# Altium PCB PCB.PcbDoc (part 1 of 2)
Units mm, origin at the board's own origin, x right, y up, seen from the top; angles counter-clockwise.
Board outline 100.5 x 40.52 mm, 2 copper layers (Top Layer, Bottom Layer); 44 components, 39 nets, 211 pads, 76 vias.
Unrouted connection lines stored in the file: 2.
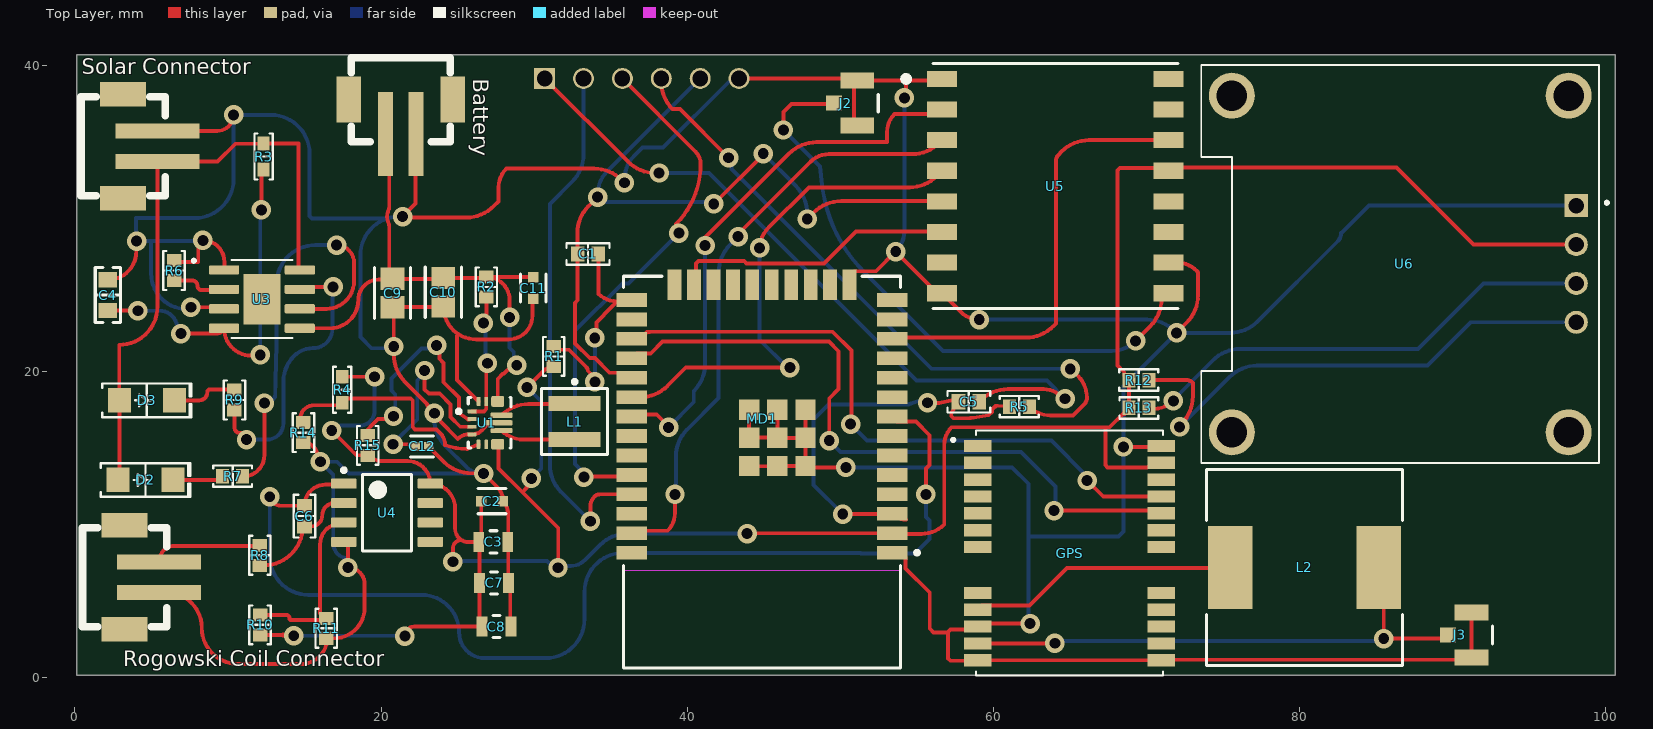
[diagram p0: Top Layer view]
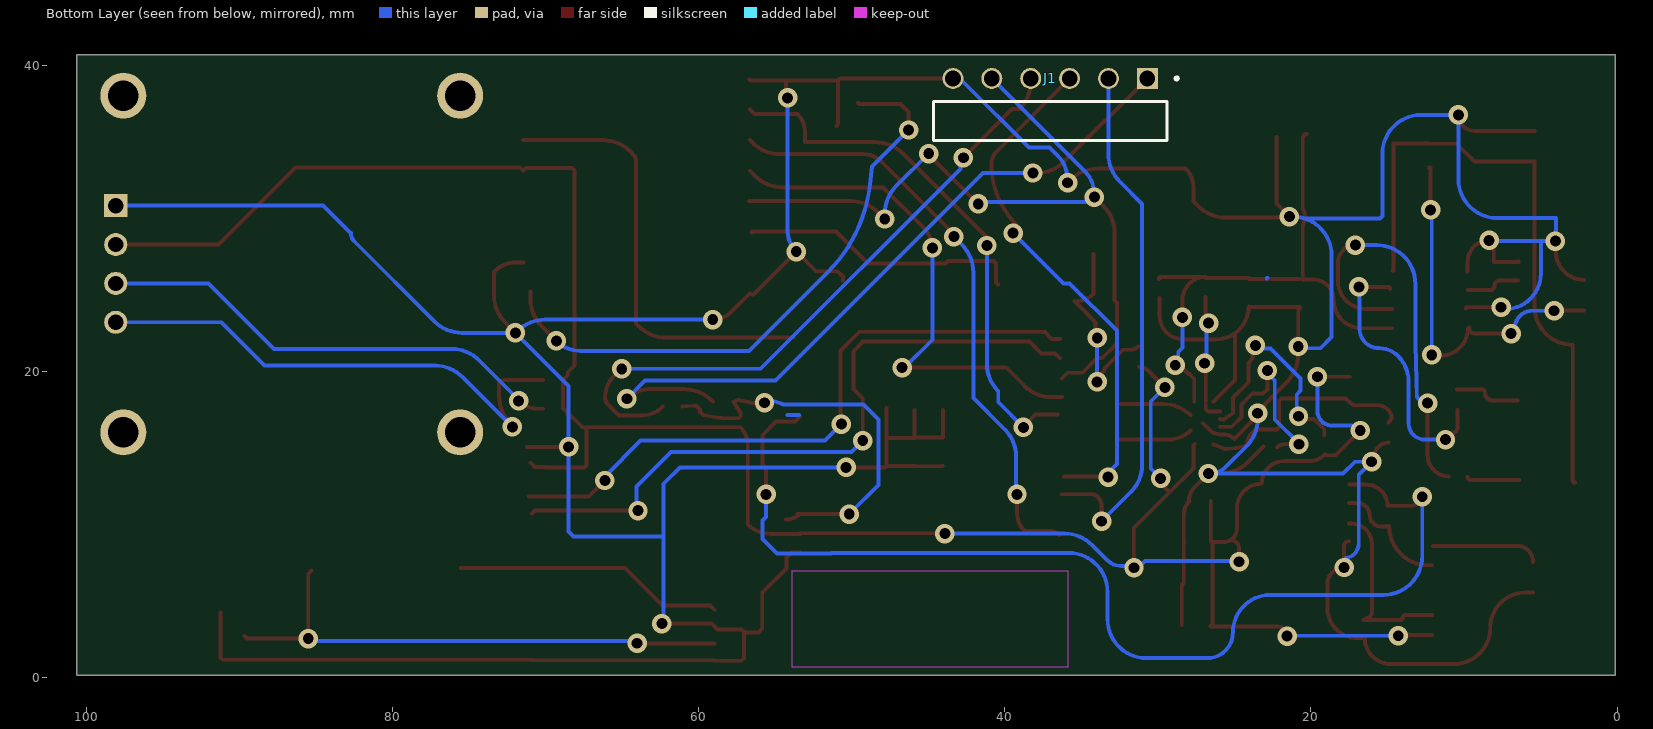
[diagram p1: Bottom Layer view, seen from below]
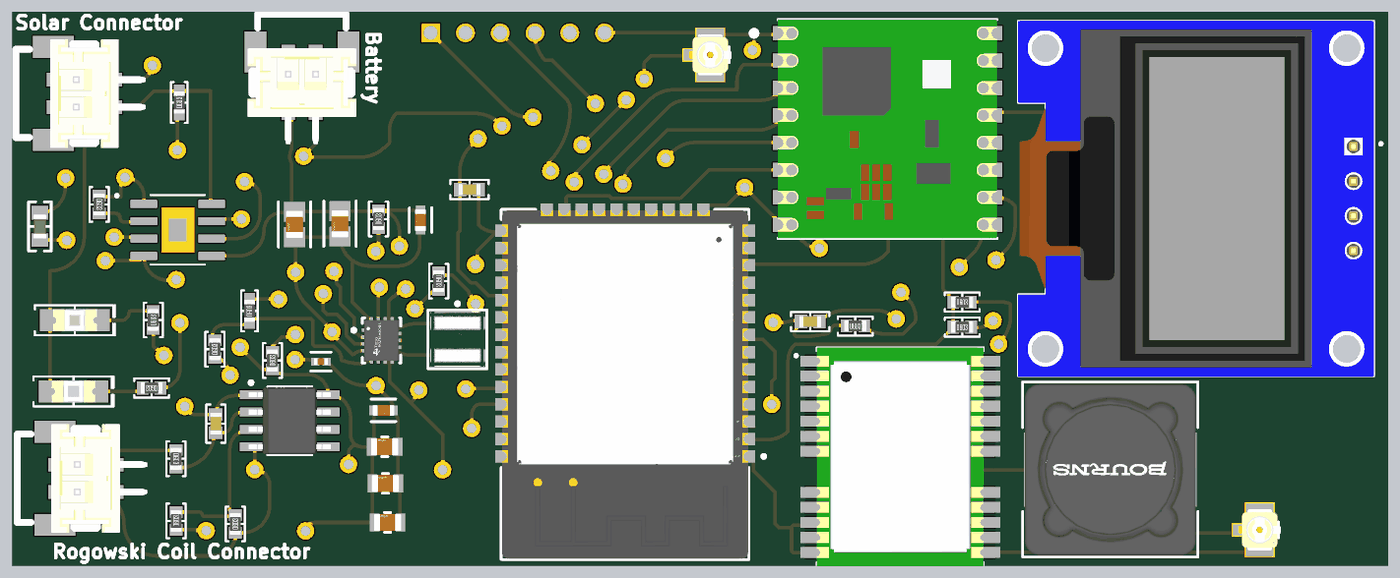
[diagram p2: 3D render of the assembled board from above, using the file's embedded part models]

## Layer stack, top to bottom
Top Solder: solder mask 0.0102, Solder Resist, Dk 3.5
Top Layer: signal copper 0.0356
Dielectric 1: dielectric 0.32, FR-4, Dk 4.8
Bottom Layer: signal copper 0.0356
Bottom Solder: solder mask 0.0102, Solder Resist, Dk 3.5

## Board outline
0.127,0.159 0.127,40.681 100.626,40.681 100.626,0.159

## Design rules (kind name [scope] priority, off if disabled: settings)
Clearance [All] p1: gap=0.254 ignorepadtopadclearanceinfootprint=FALSE
PolygonConnect [All] p1: connectstyle=Relief reliefconductorwidth=0.254 reliefentries=4 polygonreliefangle="90 Angle" airgapwidth=0.254
RoutingVias [All] p1: holewidth=0.711 width=1.27 viastyle="Through Hole" minholewidth=0.711 minwidth=1.27 maxholewidth=0.711 maxwidth=1.27
SolderMaskExpansion [All] p1: expansion=0.102 istentingtop=FALSE
SupplyNets "Schematic Supply Nets_2" [InNet('+5')] p1: voltage=0.000
SupplyNets "Schematic Supply Nets_1" [InNet('PG')] p2: voltage=0.000
SupplyNets "Schematic Supply Nets" [InNet('GND')] p3: voltage=0.000
Width [All] p1: maxlimit=0.254 minlimit=0.254 preferedwidth=0.254
30 further rules are at their usual default settings.

## Components (designator, comment, footprint, x,y, rotation, side; value= is the part's Value field where it differs from the comment)
Battery "B2B-PH-SM4-TB(LF)(SN)" B2B-PH-SM4-TB(LF)(SN)#1 21.286,35.502 r0 top (schematic designator "Batery Connector")
C1 "0.1µF" "CAP 0603_1608" 33.521,27.672 r0 top
C2 "TMK107BBJ106MA-T" FP-0603-L_1_6_0_2-W_0_8_0-MFG 27.246,11.525 r0 top
C3 "GRM21BC81C226ME44L" FP-GRM21B-0_2-e0_2_0_7-MFG 27.335,8.864 r180 top
C4 "10 µF" "MURATA GRM188 0603_1608" 2.154,24.982 r270 top
C5 "0.1µF" "CAP 0603_1608" 58.403,18.017 r180 top
C6 "1 µF" "CAP 0603_1608" 14.998,10.552 r90 top
C7 "GRM21BC81C226ME44L" FP-GRM21B-0_2-e0_2_0_7-MFG 27.383,6.184 r180 top
C8 "GRM21BC81C226ME44L" FP-GRM21B-0_2-e0_2_0_7-MFG 27.541,3.328 r180 top
C9 "GRM21BC71E106ME11L" FP-GRM21B-0_2-e0_2_0_7-IPC_A 20.749,25.122 r270 top
C10 "GRM21BC71E106ME11L" FP-GRM21B-0_2-e0_2_0_7-IPC_A 24.068,25.176 r270 top
C11 "TMK107BBJ106MA-T" FP-0603-L_1_6_0_2-W_0_8_0-MFG 29.948,25.446 r270 top
C12 "TMK105B7104MV-FR" FP-0402-L_1_0_0_05-W_0_5-IPC_B 22.677,15.097 r0 top
D2 "Green" "LED 1206_3216 GREEN" 4.609,12.91 r0 top
D3 "Red" "LED 1206_3216 RED" 4.701,18.112 r0 top
GPS "NEO-6M-GPS" XCVR_NEO-6M-GPS 64.98,8.13 r0 top
J1 "FTDI Connector" SAMTEC_MTSW-106-09-G-S-375-RA 37.04,36.35 r180 bottom
J2 "U.FL-R-SMT-1(10)" FP-U_FL-R-SMT-1_10-MFG 51.11,37.529 r90 top
J3 "U.FL-R-SMT-1(10)" FP-U_FL-R-SMT-1_10-MFG 91.236,2.784 r90 top
L1 "XFL4020-152MEC" FP-XFL4020-MFG 32.646,16.725 r270 top
L2 "SRR1260-270M" FP-SRR1260-MFG 80.326,7.194 r180 top value=27uH
MD1 "ESP32-WROOM-32" FP-ESP32-WROOM-32-MFG 44.892,13.419 r180 top
R1 "10 kOhms" "RES 0603_1608" 31.276,20.981 r270 top
R2 "10 kOhms" "RES 0603_1608" 26.882,25.521 r90 top
R3 "=Value" "YAGEO RES 0603_1608" 12.328,34.04 r90 top
R4 "470 kOhms" "YAGEO RES 0603_1608" 17.458,18.802 r90 top
R5 "10 kOhms" "RES 0603_1608" 61.699,17.698 r0 top
R6 "3.32 kOhms" "RES 0603_1608" 6.479,26.591 r270 top
R7 "1 kOhms" "RES 0603_1608" 10.307,13.156 r180 top
R8 "100 kOhms" "RES 0603_1608" 12.085,7.984 r270 top
R9 "1 kOhms" "RES 0603_1608" 10.424,18.134 r90 top
R10 "10 kOhms" "RES 0603_1608" 12.098,3.441 r90 top
R11 "10 kOhms" "RES 0603_1608" 16.421,3.217 r90 top
R12 "4.7 kOhms" "RES 0603_1608" 69.506,19.437 r0 top
R13 "4.7 kOhms" "RES 0603_1608" 69.511,17.614 r0 top
R14 "150 kOhms" "RES 0603_1608" 14.929,15.999 r90 top
R15 "100 kOhms" "RES 0603_1608" 19.13,15.17 r90 top
"Rogowski Coil Connector" "B2B-PH-SM4-TB(LF)(SN)" B2B-PH-SM4-TB(LF)(SN)#2 5.492,6.553 r270 top
"Solar Connector" "B2B-PH-SM4-TB(LF)(SN)" B2B-PH-SM4-TB(LF)(SN)#3 5.394,34.708 r90 top
U1 "TPS630702RNMR" FP-RNM0015A-MFG 27.098,16.637 r0 top
U3 "TP4056" SOP127P600X175-9N 12.218,24.725 r0 top
U4 "TLV2372IDR" D0008A_M 20.395,10.766 r0 top
U5 "RFM95W-868S2" XCVR_RFM95W-868S2 64.054,32.108 r0 top
U6 "DM-OLED096-636" MODULE_DM-OLED096-636 86.585,27.018 r270 top

## Footprints (in the part's own frame and the unit in brackets; to place one, negate y for a bottom-side part, rotate by r counter-clockwise, add the part's x,y. Pads: shape width x height; smd on the part's side, far side on the other; paste and mask are expansions set on the pad)
B2B-PH-SM4-TB(LF)(SN)#1 [mm]
  rect 1x5.5 smd: 1(-1,0) 2(1,0)
  rect 1.6x3 smd: 3(3.4,2.25) 4(-3.4,2.25)
  silkscreen extent -3.23,-0.5 3.23,5, body extent -3.98,-4.5 3.98,2.5, height 6.75
B2B-PH-SM4-TB(LF)(SN)#2 [mm]
  rect 1x5.5 smd: 1(-1,0) 2(1,0)
  rect 1.6x3 smd: 3(3.4,-2.25) 4(-3.4,-2.25)
  silkscreen extent -3.23,-5 3.23,0.5, body extent -3.98,-2.5 3.98,4.5, height 6.75
B2B-PH-SM4-TB(LF)(SN)#3 [mm]
  rect 1x5.5 smd: 2(1,0) ""(-1,0)
  rect 1.6x3 smd: 3(3.4,2.25) 4(-3.4,2.25)
  silkscreen extent -3.23,-0.5 3.23,5, body extent -3.98,-4.5 3.98,2.5, height 6.75
"CAP 0603_1608" [mm] "Chip Capacitor, 2-Leads, Body 1.60x0.80mm, IPC Medium Density"
  rect 0.9x1 smd: 1(-0.675,0) 2(0.675,0)
  silkscreen extent -1.4,-0.7 1.4,0.7, body extent -0.8,-0.41 0.8,0.41, height 0.82
D0008A_M [mm] "SOIC, 8-Leads, Body 5x4mm, Pitch 1.27mm, IPC Low Density"
  rrect15% 1.65x0.65 smd: 1(-2.825,1.905) 2(-2.825,0.635) 3(-2.825,-0.635) 4(-2.825,-1.905) 5(2.825,-1.905) 6(2.825,-0.635) 7(2.825,0.635) 8(2.825,1.905)
  silkscreen extent -2.95,-2.5 1.6,2.9, body extent -3,-2.45 3,2.45, height 1.63
FP-0402-L_1_0_0_05-W_0_5-IPC_B [mm]
  rect 0.615x0.572 smd paste+0 mask+0: 1(-0.429,0) 2(0.429,0)
  silkscreen extent -0.74,-0.69 0.74,0.69, body extent -0.89,-0.44 0.89,0.44, height 0.25
FP-0603-L_1_6_0_2-W_0_8_0-MFG [mm]
  rect 0.7x0.7 smd paste+0 mask+0: 1(-0.7,0) 2(0.7,0)
  silkscreen extent -0.9,-0.82 0.9,0.82, body extent -1.15,-0.6 1.15,0.6, height 0.25
FP-ESP32-WROOM-32-MFG [mm]
  rect 2x0.9 smd paste+0 mask+0: 1(-8.5,5.26) 2(-8.5,3.99) 3(-8.5,2.72) 4(-8.5,1.45) 5(-8.5,0.18) 6(-8.5,-1.09) 7(-8.5,-2.36) 8(-8.5,-3.63) 9(-8.5,-4.9) 10(-8.5,-6.17) 11(-8.5,-7.44) 12(-8.5,-8.71) 13(-8.5,-9.98) 14(-8.5,-11.25) 25(8.5,-11.25) 26(8.5,-9.98) 27(8.5,-8.71) 28(8.5,-7.44) 29(8.5,-6.17) 30(8.5,-4.9) 31(8.5,-3.63) 32(8.5,-2.36) 33(8.5,-1.09) 34(8.5,0.18) 35(8.5,1.45) 36(8.5,2.72) 37(8.5,3.99) 38(8.5,5.26)
  rect 0.9x2 smd paste+0 mask+0: 15(-5.715,-12.25) 16(-4.445,-12.25) 17(-3.175,-12.25) 18(-1.905,-12.25) 19(-0.635,-12.25) 20(0.635,-12.25) 21(1.905,-12.25) 22(3.175,-12.25) 23(4.445,-12.25) 24(5.715,-12.25)
  rect 1.33x1.33 smd paste+0 mask+0: 39(-2.835,-0.405) 39(-2.835,-4.075) 39(-2.835,-2.24) 39(-1,-0.405) 39(-1,-2.24) 39(-1,-4.075) 39(0.835,-0.405) 39(0.835,-2.24) 39(0.835,-4.075)
  Keep-Out Layer region: -9,6.45 9,6.45 9,12.75 -9,12.75
  Keep-Out Layer region: -9,6.45 9,6.45 9,12.75 -9,12.75
  silkscreen extent -10.25,-12.8 9.05,12.8, body extent -9.6,-13.35 9.6,12.9, height 0.25
FP-GRM21B-0_2-e0_2_0_7-IPC_A [mm]
  rect 1.455x1.556 smd paste+0 mask+0: 1(-0.926,0) 2(0.926,0)
  silkscreen extent -1.65,-1.18 1.65,1.18, body extent -2.15,-1.28 2.15,1.28, height 0.25
FP-GRM21B-0_2-e0_2_0_7-MFG [mm]
  rect 0.7x1.3 smd paste+0 mask+0: 1(-0.95,0) 2(0.95,0)
  silkscreen extent -0.23,-0.72 0.23,0.72, body extent -1.4,-0.82 1.4,0.82, height 0.25
FP-RNM0015A-MFG [mm]
  rrect40% 0.6x0.25 smd paste+0 mask-1000: 1(-1.15,0.75) 2(-1.15,0.25) 3(-1.15,-0.25) 4(-1.15,-0.75)
  rrect40% 0.25x0.6 smd paste+0 mask-1000: 5(-0.725,-1.4) 6(-0.225,-1.4) 14(-0.225,1.4) 15(-0.725,1.4)
  rrect29% 0.85x0.7 smd paste-1000 mask-1000: 7-8(0.525,-1.4) 12-13(0.525,1.4)
  rrect57% 1.45x0.35 smd paste-1000 mask-1000: 9(0.775,-0.5) 11(0.775,0.5)
  rrect57% 1.8x0.35 smd paste-1000 mask-1000: 10(0.6,0)
  silkscreen extent -2.15,-1.65 1.4,1.65, body extent -1.55,-1.85 1.6,1.85, height 0.25
FP-SRR1260-MFG [mm]
  rect 2.9x5.4 smd paste+0 mask+0: 1(-4.85,0) 2(4.85,0)
  silkscreen extent -6.4,-6.4 6.4,6.4, body extent -6.5,-6.5 6.5,6.5, height 0.25
FP-U_FL-R-SMT-1_10-MFG [mm]
  rect 1x1.05 smd paste-1000 mask+0: 1(0,1.525)
  rect 1.05x2.2 smd paste-1000 mask+0: 2(-1.475,0) 3(1.475,0)
  silkscreen extent -0.58,-1.38 0.58,-1.38, body extent -2.1,-1.48 2.1,2.15, height 0.25
FP-XFL4020-MFG [mm]
  rect 0.98x3.4 smd paste+0 mask+0: 1(-1.185,0) 2(1.185,0)
  silkscreen extent -2.72,-2.15 2.15,2.15, body extent -2.25,-2.25 2.25,2.25, height 0.25
"LED 1206_3216 GREEN" [mm] "Chip Diode, 2-Leads, Body 3.13x1.55mm, IPC Medium Density"
  rect 1.5x1.6 smd: 1(-1.8,0) 2(1.8,0)
  silkscreen extent -2.92,-1.1 2.92,1.1, body extent -1.6,-0.8 1.6,0.8, height 0.9
"LED 1206_3216 RED" [mm] "Chip Diode, 2-Leads, Body 3.13x1.55mm, IPC Medium Density"
  rect 1.5x1.6 smd: 1(-1.8,0) 2(1.8,0)
  silkscreen extent -2.92,-1.1 2.92,1.1, body extent -1.6,-0.8 1.6,0.8, height 0.9
MODULE_DM-OLED096-636 [mm]
  rect 1.508x1.508 / inner round 1.508 / far side rect 1.508x1.508 hole 1: 1(-3.81,11.5)
  round 1.508 hole 1: 2(-1.27,11.5) 3(1.27,11.5) 4(3.81,11.5)
  round 3 hole 2: S1(-11,11) S2(11,11) S3(11,-11) S4(-11,-11)
  silkscreen extent -13,-13 13,13.6, body extent -13,-13 13,13, height 5.66
"MURATA GRM188 0603_1608" [mm] "Chip Capacitor, 2-Leads, Body 1.60x0.80mm"
  rect 1x1.2 smd: 1(-1,0) 2(1,0)
  silkscreen extent -1.8,-0.83 1.8,0.83, body extent -0.9,-0.5 0.9,0.5, height 1
"RES 0603_1608" [mm] "Chip Resistor, 2-Leads, Body 1.60x0.80mm, IPC Medium Density"
  rect 0.85x0.95 smd: 1(-0.65,0) 2(0.65,0)
  silkscreen extent -1.27,-0.7 1.27,0.7, body extent -0.8,-0.4 0.8,0.4, height 0.45
SAMTEC_MTSW-106-09-G-S-375-RA [mm]
  rect 1.37x1.37 / inner round 1.37 / far side rect 1.37x1.37 hole 1.02: 01(6.35,2.79)
  round 1.37 hole 1.02: 02(3.81,2.79) 03(1.27,2.79) 04(-1.27,2.79) 05(-3.81,2.79) 06(-6.35,2.79)
  silkscreen extent -7.62,-1.27 8.37,2.89
SOP127P600X175-9N [mm]
  rrect25% 1.97x0.6 smd: 1(-2.475,1.905) 2(-2.475,0.635) 3(-2.475,-0.635) 4(-2.475,-1.905) 5(2.475,-1.905) 6(2.475,-0.635) 7(2.475,0.635) 8(2.475,1.905)
  rect 2.413x3.302 smd paste-3: 9(0,0)
  silkscreen extent -4.54,-2.55 2,2.6, body extent -3,-2.45 3,2.45
XCVR_NEO-6M-GPS [mm]
  rect 1.8x0.8 smd paste-2: 1(-6,7) 2(-6,5.9) 3(-6,4.8) 4(-6,3.7) 5(-6,2.6) 6(-6,1.5) 7(-6,0.4) 8(-6,-2.6) 9(-6,-3.7) 10(-6,-4.8) 11(-6,-5.9) 12(-6,-7) 13(6,-7) 14(6,-5.9) 15(6,-4.8) 16(6,-3.7) 17(6,-2.6) 18(6,0.4) 19(6,1.5) 20(6,2.6) 21(6,3.7) 22(6,4.8) 23(6,5.9) 24(6,7)
  silkscreen extent -7.7,-8 6.1,8, body extent -6.1,-8 6.1,8, height 2.6
XCVR_RFM95W-868S2 [mm]
  rect 1.95x1.05 smd: 1(-7.4,7) 2(-7.4,5) 3(-7.4,3) 4(-7.4,1) 5(-7.4,-1) 6(-7.4,-3) 7(-7.4,-5) 8(-7.4,-7) 9(7.4,-7) 10(7.4,-5) 11(7.4,-3) 12(7.4,-1) 13(7.4,1) 14(7.4,3) 15(7.4,5) 16(7.4,7)
  silkscreen extent -10.04,-8 8,8, body extent -8,-8 8,8, height 1.8
"YAGEO RES 0603_1608" [mm] "Chip Resistor, 2-Leads, Body 1.60x0.80mm"
  rect 0.9x0.8 smd: 1(-0.85,0) 2(0.85,0)
  silkscreen extent -1.5,-0.6 1.5,0.6, body extent -0.8,-0.4 0.8,0.4, height 0.45

## Part data
Battery "Rogowski Coil Connector" "Solar Connector": "Connector Header Surface Mount 2 position 0.079 (2.00mm)", Package="NON STANDARD-2 JST", Check_prices=https://www.snapeda.com/parts/B2B-PH-SM4-TB(LF)(SN)/JST+Sales+America+Inc./view-part/?ref=eda, MF="JST Sales", MP=B2B-PH-SM4-TB(LF)(SN), SnapEDA_Link=https://www.snapeda.com/parts/B2B-PH-SM4-TB(LF)(SN)/JST+Sales+America+Inc./view-part/?ref=snap
C1 C5: library part 06033C104K4T4A, "CAP CER 0.1UF 25V X7R 0603", Device Package="0603 (1608 Metric)", manufacturer="AVX Corporation", Operating Temperature="-55°C ~ 125°C", Ratings=AEC-Q200, Supplier Part Number 1=478-10673-1-ND, Temperature Coefficient=X7R, Tolerance=±10%, Voltage - Rated=25V, Applications=Automotive, Capacitance=0.1µF, componentlink1description=Datasheet, componentlink1url=http://datasheets.avx.com/AutoMLCC.pdf, componentlink2description="DigiKey Link", componentlink2url=http://digikey.com/product-detail/en/avx-corporation/06033C104K4T4A/478-10673-1-ND/7536544, lastupdated="02/09/2020 1:03:35 am", Lifecycle Status=Active, Minimum Order=1, Mounting Type="Surface Mount, MLCC", Package / Case="0603 (1608 Metric)", packaging=TapeAndReel, Part Number=06033C104K4T4A, Part Status=Active, partid=2749, price=0.02, series=-, Size / Dimension="0.063\" L x 0.032\" W (1.60mm x 0.81mm)", Supplier 1=DigiKey, Thickness (Max)="0.035\" (0.90mm)"
C2 C11: library part CMP-14477-005164-2, "Multilayer Ceramic Capacitor 10uF 25V X5R 20% SMD 0603 T/R", Capacitance=10uF, Case Code (Imperial)=0603, Case Code (Metric)=1608, Max Operating Temperature=85°C, Min Operating Temperature=-55°C, Tolerance=20%, Voltage Rating=25V, Case/Package=0603, Lead Free="Lead Free", Mount="Surface Mount", packaging="Tape and Reel", RoHS Compliant=Yes
C3 C7 C8: library part CMP-06035-012913-1, "Chip Multilayer Ceramic Capacitors for General Purpose, 0805, 22uF, X6S, 22%, 20%, 16V", Capacitance=22uF, Case Code (Imperial)=0805, Case Code (Metric)=2012, Dielectric=X6S, Max Operating Temperature=105°C, Min Operating Temperature=-55°C, Package Quantity=3000, Tolerance=20%, Voltage Rating=16V, Case/Package=0805, Height=1.25mm, Lead Free="Lead Free", Length=0.079inch, Mount="Surface Mount", packaging="Tape and Reel", Termination=SMD/SMT, Thickness=0.057inch, Voltage Rating (DC)=16V, Weight=0.000335oz, Width=1.25mm
C4: library part GRM188C80E106ME47D, "CAP CER 10UF 2.5V X6S 0603", Device Package="0603 (1608 Metric)", manufacturer="Murata Electronics", Operating Temperature="-55°C ~ 105°C", Supplier Part Number 1=490-8278-1-ND, Temperature Coefficient=X6S, Tolerance=±20%, Voltage - Rated=2.5V, Applications="General Purpose", Capacitance="10 µF", componentlink1description=Datasheet, componentlink1url=https://www.murata.com/~/media/webrenewal/support/library/catalog/products/capacitor/mlcc/c02e.ashx?la=en-us, componentlink2description="DigiKey Link", componentlink2url=https://www.digikey.com/en/products/detail/murata-electronics/GRM188C80E106ME47D/2612380, lastupdated="20/07/2024 12:23:22 am", Lifecycle Status=Active, Minimum Order=1, Mounting Type="Surface Mount, MLCC", Package / Case="0603 (1608 Metric)", packaging=TapeAndReel, Part Number=GRM188C80E106ME47D, Part Status=Active, partid=2395, price=0.03, series=GRM, Size / Dimension="0.063\" L x 0.031\" W (1.60mm x 0.80mm)", Supplier 1=DigiKey, Thickness (Max)="0.035\" (0.90mm)"
C6: library part C0603X105M9RACAUTO, "CAP CER 1UF 6.3V X7R 0603", Device Package="0603 (1608 Metric)", manufacturer=KEMET, Operating Temperature="-55°C ~ 125°C", Ratings=AEC-Q200, Supplier Part Number 1=399-17721-1-ND, Temperature Coefficient=X7R, Tolerance=±20%, Voltage - Rated=6.3V, Applications="Automotive, Boardflex Sensitive", Capacitance="1 µF", componentlink1description=Datasheet, componentlink1url=https://api.kemet.com/component-edge/download/datasheet/C0603X105M9RACAUTO.pdf, componentlink2description="DigiKey Link", componentlink2url=https://www.digikey.com/en/products/detail/kemet/C0603X105M9RACAUTO/8635848, Features="Soft Termination", lastupdated="09/02/2024 8:10:30 pm", Lifecycle Status=Active, Minimum Order=1, Mounting Type="Surface Mount, MLCC", Package / Case="0603 (1608 Metric)", packaging=TapeAndReel, Part Number=C0603X105M9RACAUTO, Part Status=Active, partid=2401, price=0.06, series="SMD Auto X7R Flex", Size / Dimension="0.063\" L x 0.031\" W (1.60mm x 0.80mm)", Supplier 1=DigiKey, Thickness (Max)="0.037\" (0.95mm)"
C9 C10: library part CMP-06035-056773-1, "Chip Multilayer Ceramic Capacitors for General Purpose, 0805, 10uF, X7S, 22%, 20%, 25V", Capacitance=10uF, Case Code (Imperial)=0805, Case Code (Metric)=2012, Dielectric=X7S, Max Operating Temperature=125°C, Min Operating Temperature=-55°C, Package Quantity=3000, Tolerance=20%, Voltage Rating=25V, Case/Package=0805, Height=1.25mm, Length=0.079inch, Mount="Surface Mount", packaging="Tape and Reel", Termination=SMD/SMT, Thickness=0.057inch, Voltage Rating (DC)=25V, Weight=0.000335oz, Width=0.049inch
C12: library part CMP-14477-003834-2, "None", Capacitance=100nF, Case/Package=0402, Max Operating Temperature=125°C, Min Operating Temperature=-55°C, Tolerance=20%, Voltage Rating=25V, Mount="Surface Mount", packaging="Tape and Reel", RoHS Compliant=Yes
D2: library part HSMQ-C380, "LED GREEN SMD", Current - Test=20mA, Device Package="1206 (3216 Metric)", Lens Color=1.95mm, manufacturer="Broadcom Limited", Supplier Part Number 1=516-4361-1-ND, Voltage - Forward (Vf) (Typ)=3.4V, Color=Green, componentlink1description=Datasheet, componentlink1url=https://docs.broadcom.com/docs/12380614, componentlink2description="DigiKey Link", componentlink2url=https://www.digikey.com/en/products/detail/broadcom-limited/HSMQ-C380/8509698, Configuration=Standard, Height (Max)=1.95mm, lastupdated="03/06/2024 7:59:11 pm", Lens Size="1.40mm Dia", Lens Style="Round with Domed Top", Lifecycle Status=Active, Minimum Order=1, Mounting Type="Surface Mount", Package / Case="1206 (3216 Metric)", packaging=TapeAndReel, Part Number=HSMQ-C380, Part Status=Active, partid=567, price=0.48, series=-, Size / Dimension="3.20mm L x 1.60mm W", Supplier 1=DigiKey, Viewing Angle=15°, Wavelength - Dominant=528nm, Wavelength - Peak=521nm
D3: library part HSMC-C380, "LED RED SMD", Current - Test=20mA, Device Package="1206 (3216 Metric)", Lens Color=1.95mm, manufacturer="Broadcom Limited", Supplier Part Number 1=516-HSMC-C380CT-ND, Voltage - Forward (Vf) (Typ)=2V, Color=Red, componentlink1description=Datasheet, componentlink1url=https://docs.broadcom.com/docs/HSMC-C380-DS100, componentlink2description="DigiKey Link", componentlink2url=https://www.digikey.com/en/products/detail/broadcom-limited/HSMC-C380/8509679, Configuration=Standard, Height (Max)=1.95mm, lastupdated="03/06/2024 8:00:41 pm", Lens Size="1.40mm Dia", Lens Style="Round with Domed Top", Lifecycle Status=Active, Minimum Order=1, Mounting Type="Surface Mount", Package / Case="1206 (3216 Metric)", packaging=TapeAndReel, Part Number=HSMC-C380, Part Status=Active, partid=196, price=0.23, series=-, Size / Dimension="3.20mm L x 1.60mm W", Supplier 1=DigiKey, Viewing Angle=15°, Wavelength - Dominant=630nm, Wavelength - Peak=643nm
GPS: "GPS Development Tools SparkFun GNSS-RTK Dead Reckoning Breakout - ZED-F9K (Qwiic)", Package=None, Availability="Not in stock", Check_prices=https://www.snapeda.com/parts/NEO-6M-GPS/u-blox/view-part/?ref=eda, MF=u-blox, MP=NEO-6M-GPS, price=None, SnapEDA_Link=https://www.snapeda.com/parts/NEO-6M-GPS/u-blox/view-part/?ref=snap
J1: library part MTSW-106-09-G-S-375-RA, "Connector Header Through Hole, Right Angle 6 position 0.100 (2.54mm)", Package=None, Check_prices=https://www.snapeda.com/parts/MTSW-106-09-G-S-375-RA/Samtec/view-part/?ref=eda, MF="Samtec Inc.", MP=MTSW-106-09-G-S-375-RA, SnapEDA_Link=https://www.snapeda.com/parts/MTSW-106-09-G-S-375-RA/Samtec/view-part/?ref=snap
J2 J3: library part CMP-2000-05152-3, "CONN U.FL RCPT STR 50 OHM SMD", Dielectric Material=Polymer, Frequency=6GHz, Housing Color=Beige, Insulation Resistance=500MR, Max Operating Temperature=90°C, Min Operating Temperature=-40°C, Package Quantity=2500, Body Material=Bronze, Body Plating=Silver, Connector Type=Coaxial, Contact Material=Brass, Contact Plating=Gold, Depth=3.1mm, Fastening Type=Snap, Gender=Male, Impedance=50R, Lead Free="Lead Free", Length=3mm, Max Frequency=6GHz, Mount="Surface Mount", Orientation=Straight, packaging="Cut Tape", Radiation Hardening=No, REACH SVHC="No SVHC", series=U.FL, Termination=Solder, Weight=0.001764oz, Wire/Cable Type=Coaxial
L1: library part CMP-11268-000104-1, "Inductor Power Shielded Wirewound 1.5uH 20% 100KHz 9.1A 15.8mOhm DCR 1515 Automotive Embossed Plastic T/R", Case/Package=SMD/SMT, DC Resistance (DCR)=15.8mR, Inductance=1.5uH, Inductance Tolerance=20%, Max DC Current=9.1A, Max Operating Temperature=125°C, Min Operating Temperature=-40°C, Saturation Current=4.1A, Self Resonant Frequency=59MHz, Test Frequency=100kHz, Core Material=Composite, Height=2.1mm, Lead Free="Contains Lead", Length=4.3mm, Mount="Surface Mount", packaging="Tape and Reel", REACH SVHC="No SVHC", RMS Current (Irms)=9.1A, RoHS Compliant=Yes, series=XFL4020, Shielding=Shielded, Termination=SMD/SMT, Tolerance=20%, Width=4.3mm
L2: library part CMP-07248-000018-1, "FIXED IND 27UH 3.6A 45 MOHM SMD", Inductance=27uH, manufacturer=Bourns, Package=SRR1260, Rms Current=3.6A, Saturation Current=3.3A, Self Resonant Frequency=12.7MHz, Series Resistance=45mΩ, Temperature="-40°C to +125°C", Temperature Range High=+125°C, Temperature Range Low=-40°C, Test Frequency=2.52MHz, Tolerance=20%, Automotive=No, Category=Ind, componentlink2description=Datasheet, componentlink2url=https://www.bourns.com/docs/product-datasheets/srr1260.pdf?sfvrsn=a4409aa5_15, Composition=Wirewound, Core Material=Ferrite, Device Class L1="Passive Components", Device Class L2=Inductors, Device Class L3="Fixed Inductors", Digikey Description="FIXED IND 27UH 3.6A 45 MOHM SMD", Height=6.5mm, Lead Free=Yes, Manufacturer Part Number=SRR1260-270M, Mouser Description="Fixed Inductors 27uH 20% SMD 1260", Octopart=https://octopart.com/srr1260-270m-bourns-1930921, Q Factor=26, RoHS=TRUE
MD1: library part CMP-194065-000008-1, "RX TXRX MOD WIFI SURFACE MOUNT", Case/Package=SMD/SMT, Frequency=2.5GHz, Max Operating Temperature=85°C, Min Operating Temperature=-40°C, Operating Supply Voltage=3.6V, Package Quantity=550, Data Rate=150Mbps, Mount="Surface Mount", packaging="Cut Tape", Sensitivity=-98dBm, Weight=0.088185oz
R1 R5 R10 R11: library part CRCW060310K0JNEA, "RES SMD 10K OHM 5% 1/10W 0603", Device Package="0603 (1608 Metric)", manufacturer="Vishay Dale", Operating Temperature="-55°C ~ 155°C", Power (Watts)="0.1W, 1/10W", Ratings=AEC-Q200, Supplier Device Package=0603, Supplier Part Number 1=541-10KGCT-ND, Temperature Coefficient=±200ppm/°C, Tolerance=±5%, componentlink1description=Datasheet, componentlink1url=http://www.vishay.com/docs/20035/dcrcwe3.pdf, componentlink2description="DigiKey Link", componentlink2url=https://www.digikey.com/en/products/detail/vishay-dale/CRCW060310K0JNEA/1174253, Composition="Thick Film", Features="Automotive AEC-Q200", Height - Seated (Max)="0.020\" (0.50mm)", lastupdated="09/02/2024 8:43:35 pm", Lifecycle Status=Active, Minimum Order=1, Number of Terminations=2, Package / Case="0603 (1608 Metric)", packaging=CutTape, Part Number=CRCW060310K0JNEA, Part Status=Active, partid=5216, price=0.01, Resistance="10 kOhms", series=CRCW, Size / Dimension="0.063\" L x 0.033\" W (1.60mm x 0.85mm)", Supplier 1=DigiKey
R2: library part RNCS0603BKE10K0, "RES 10K OHM 0.1% 1/16W 0603", Device Package="0603 (1608 Metric)", manufacturer="Stackpole Electronics Inc", Operating Temperature="-55°C ~ 155°C", Power (Watts)="0.063W, 1/16W", Ratings=AEC-Q200, Supplier Device Package=0603, Supplier Part Number 1=RNCS0603BKE10K0CT-ND, Temperature Coefficient=±25ppm/°C, Tolerance=±0.1%, componentlink1description=Datasheet, componentlink1url=https://www.seielect.com/catalog/sei-rncs_rnch.pdf, componentlink2description="DigiKey Link", componentlink2url=https://www.digikey.com/en/products/detail/stackpole-electronics-inc/RNCS0603BKE10K0/1708836, Composition="Thin Film", Features="Anti-Corrosive, Automotive AEC-Q200, Moisture Resistant", Height - Seated (Max)="0.022\" (0.55mm)", lastupdated="09/02/2024 8:43:37 pm", Lifecycle Status=Active, Minimum Order=1, Number of Terminations=2, Package / Case="0603 (1608 Metric)", packaging=TapeAndReel, Part Number=RNCS0603BKE10K0, Part Status=Active, partid=4838, price=0.06, Resistance="10 kOhms", series=RNCS, Size / Dimension="0.061\" L x 0.031\" W (1.55mm x 0.80mm)", Supplier 1=DigiKey
R3: library part RL0603FR-070R4L, "RES 0.4 OHM 1% 1/10W 0603", Device Package="0603 (1608 Metric)", manufacturer=Yageo, Operating Temperature="-55°C ~ 155°C", Power (Watts)="0.1W, 1/10W", Ratings=AEC-Q200, Resistance="400 mOhms", Supplier Device Package=0603, Supplier Part Number 1=311-.4QCT-ND, Temperature Coefficient=±800ppm/°C, Tolerance=±1%, componentlink1description=Datasheet, componentlink1url=http://www.yageo.com/documents/recent/PYu-RL_Group_521_RoHS_L_2.pdf, componentlink2description="DigiKey Link", componentlink2url=https://www.digikey.com/en/products/detail/yageo/RL0603FR-070R4L/3885512, Composition="Thick Film", Features="Current Sense", Height - Seated (Max)="0.022\" (0.55mm)", lastupdated="25/07/2024 9:19:17 am", Lifecycle Status=Active, Minimum Order=1, Number of Terminations=2, Package / Case="0603 (1608 Metric)", packaging=TapeAndReel, Part Number=RL0603FR-070R4L, Part Status=Active, partid=24886, price=0.03, series=RL, Size / Dimension="0.063\" L x 0.031\" W (1.60mm x 0.80mm)", Supplier 1=DigiKey
R4: library part AC0603JR-07470KL, "RES SMD 470K OHM 5% 1/10W 0603", Device Package="0603 (1608 Metric)", manufacturer=Yageo, Operating Temperature="-55°C ~ 155°C", Power (Watts)="0.1W, 1/10W", Ratings=AEC-Q200, Supplier Device Package=0603, Supplier Part Number 1=YAG3672CT-ND, Temperature Coefficient=±100ppm/°C, Tolerance=±5%, componentlink1description=Datasheet, componentlink1url=https://www.yageo.com/upload/media/product/productsearch/datasheet/rchip/PYu-AC_51_RoHS_L_7.pdf, componentlink2description="DigiKey Link", componentlink2url=https://www.digikey.com/en/products/detail/yageo/AC0603JR-07470KL/5896462, Composition="Thick Film", Features="Automotive AEC-Q200, Moisture Resistant", Height - Seated (Max)="0.022\" (0.55mm)", lastupdated="25/07/2024 9:19:32 am", Lifecycle Status=Active, Minimum Order=1, Number of Terminations=2, Package / Case="0603 (1608 Metric)", packaging=CutTape, Part Number=AC0603JR-07470KL, Part Status=Active, partid=5238, price=0.01, Resistance="470 kOhms", series=AC, Size / Dimension="0.063\" L x 0.031\" W (1.60mm x 0.80mm)", Supplier 1=DigiKey
R6: library part ERJ-PB3B3321V, "RES SMD 3.32K OHM 0.1% 1/5W 0603", Device Package="0603 (1608 Metric)", manufacturer="Panasonic Electronic Components", Operating Temperature="-55°C ~ 155°C", Power (Watts)="0.2W, 1/5W", Ratings=AEC-Q200, Supplier Device Package=0603, Supplier Part Number 1=P20030CT-ND, Temperature Coefficient=±50ppm/°C, Tolerance=±0.1%, componentlink1description=Datasheet, componentlink1url=https://industrial.panasonic.com/cdbs/www-data/pdf/RDM0000/AOA0000C328.pdf, componentlink2description="DigiKey Link", componentlink2url=https://www.digikey.com/en/products/detail/panasonic-electronic-components/ERJ-PB3B3321V/6212813, Composition="Thick Film", Features="Automotive AEC-Q200, Pulse Withstanding", Height - Seated (Max)="0.022\" (0.55mm)", lastupdated="09/02/2024 8:43:36 pm", Lifecycle Status=Active, Minimum Order=1, Number of Terminations=2, Package / Case="0603 (1608 Metric)", packaging=TapeAndReel, Part Number=ERJ-PB3B3321V, Part Status=Active, partid=4916, price=0.02, Resistance="3.32 kOhms", series=ERJ-PB3, Size / Dimension="0.063\" L x 0.031\" W (1.60mm x 0.80mm)", Supplier 1=DigiKey
R7 R9: library part CPF0603B1K0E, "RES SMD 1K OHM 0.1% 1/16W 0603", Device Package="0603 (1608 Metric)", manufacturer="TE Connectivity Passive Product", Operating Temperature="-55°C ~ 155°C", Power (Watts)="0.063W, 1/16W", Supplier Device Package=0603, Supplier Part Number 1=A119887CT-ND, Temperature Coefficient=±25ppm/°C, Tolerance=±0.1%, componentlink1description=Datasheet, componentlink1url=https://www.te.com/commerce/DocumentDelivery/DDEController?Action=srchrtrv&DocNm=1773200&DocType=DS&DocLang=English, componentlink2description="DigiKey Link", componentlink2url=https://www.digikey.com/en/products/detail/te-connectivity-passive-product/CPF0603B1K0E/2390473, Composition="Thin Film", Height - Seated (Max)="0.022\" (0.55mm)", lastupdated="09/02/2024 8:43:37 pm", Lifecycle Status=Active, Minimum Order=1, Number of Terminations=2, Package / Case="0603 (1608 Metric)", packaging=TapeAndReel, Part Number=CPF0603B1K0E, Part Status=Active, partid=4877, price=0.09, Resistance="1 kOhms", series="CPF, Neohm", Size / Dimension="0.061\" L x 0.031\" W (1.55mm x 0.80mm)", Supplier 1=DigiKey
R8 R15: library part RNCS0603BKE100K, "RES 100K OHM 0.1% 1/16W 0603", Device Package="0603 (1608 Metric)", manufacturer="Stackpole Electronics Inc", Operating Temperature="-55°C ~ 155°C", Power (Watts)="0.063W, 1/16W", Ratings=AEC-Q200, Supplier Device Package=0603, Supplier Part Number 1=RNCS0603BKE100KCT-ND, Temperature Coefficient=±25ppm/°C, Tolerance=±0.1%, componentlink1description=Datasheet, componentlink1url=https://www.seielect.com/catalog/sei-rncs_rnch.pdf, componentlink2description="DigiKey Link", componentlink2url=https://www.digikey.com/en/products/detail/stackpole-electronics-inc/RNCS0603BKE100K/1708835, Composition="Thin Film", Features="Anti-Corrosive, Automotive AEC-Q200, Moisture Resistant", Height - Seated (Max)="0.022\" (0.55mm)", lastupdated="09/02/2024 8:43:37 pm", Lifecycle Status=Active, Minimum Order=1, Number of Terminations=2, Package / Case="0603 (1608 Metric)", packaging=TapeAndReel, Part Number=RNCS0603BKE100K, Part Status=Active, partid=4849, price=0.06, Resistance="100 kOhms", series=RNCS, Size / Dimension="0.061\" L x 0.031\" W (1.55mm x 0.80mm)", Supplier 1=DigiKey
R12 R13: library part ERA-3AEB472V, "RES SMD 4.7K OHM 0.1% 1/10W 0603", Device Package="0603 (1608 Metric)", manufacturer="Panasonic Electronic Components", Operating Temperature="-55°C ~ 155°C", Power (Watts)="0.1W, 1/10W", Ratings=AEC-Q200, Supplier Device Package=0603, Supplier Part Number 1=P4.7KDBCT-ND, Temperature Coefficient=±25ppm/°C, Tolerance=±0.1%, componentlink1description=Datasheet, componentlink1url=https://industrial.panasonic.com/cdbs/www-data/pdf/RDM0000/AOA0000C307.pdf, componentlink2description="DigiKey Link", componentlink2url=https://www.digikey.com/en/products/detail/panasonic-electronic-components/ERA-3AEB472V/1465870, Composition="Thin Film", Features="Automotive AEC-Q200", Height - Seated (Max)="0.022\" (0.55mm)", lastupdated="09/02/2024 8:43:34 pm", Lifecycle Status=Active, Minimum Order=1, Number of Terminations=2, Package / Case="0603 (1608 Metric)", packaging=TapeAndReel, Part Number=ERA-3AEB472V, Part Status=Active, partid=5519, price=0.03, Resistance="4.7 kOhms", series=ERA-3A, Size / Dimension="0.063\" L x 0.031\" W (1.60mm x 0.80mm)", Supplier 1=DigiKey
R14: library part CRGP0603F150K, "RES 150K OHM 1% 1/4W 0603", Device Package="0603 (1608 Metric)", manufacturer="TE Connectivity Passive Product", Operating Temperature="-55°C ~ 155°C", Power (Watts)="0.25W, 1/4W", Supplier Device Package=0603, Supplier Part Number 1=A130442CT-ND, Temperature Coefficient=±100ppm/°C, Tolerance=±1%, componentlink1description=Datasheet, componentlink1url=https://www.te.com/commerce/DocumentDelivery/DDEController?Action=srchrtrv&DocNm=9-1773463-9&DocType=DS&DocLang=English, componentlink2description="DigiKey Link", componentlink2url=https://www.digikey.com/en/products/detail/te-connectivity-passive-product/CRGP0603F150K/8577044, Composition="Thick Film", Features="Pulse Withstanding", Height - Seated (Max)="0.022\" (0.55mm)", lastupdated="09/02/2024 8:43:36 pm", Lifecycle Status=Active, Minimum Order=1, Number of Terminations=2, Package / Case="0603 (1608 Metric)", packaging=TapeAndReel, Part Number=CRGP0603F150K, Part Status=Active, partid=5042, price=0.02, Resistance="150 kOhms", series=CRGP, Size / Dimension="0.063\" L x 0.031\" W (1.60mm x 0.80mm)", Supplier 1=DigiKey
U1: library part CMP-04918-000193-1, "POWER MANAGEMENT"
U3: "Complete single cell Li-Ion battery with a constant current / constant voltage linear charger", Package=Package, Availability="Not in stock", Check_prices=https://www.snapeda.com/parts/TP4056/NanJing+Top+Power+ASIC+Corp./view-part/?ref=eda, MF="NanJing Top Power ASIC Corp.", MP=TP4056, price=None, SnapEDA_Link=https://www.snapeda.com/parts/TP4056/NanJing+Top+Power+ASIC+Corp./view-part/?ref=snap
U4: library part CMP-0272-02948-3, "550 uA/Ch, 3 MHz, RRIO Operational Amplifier, 2.7 to 16 V, -40 to 125 degC, 8-pin SOIC (D8), Green (RoHS & no Sb/Br)", manufacturer="Texas Instruments", Rating=Catalog, Total Supply Voltage(Max)(+5V is 5, +/-5V is 10)=16, Total Supply Voltage(Min)(+5V is 5, +/-5V is 10)=2.7, CMRR(Min)(dB)=50, Code_JEDEC=MS-012, componentlink1description="Manufacturer URL", componentlink1url=http://www.ti.com/, componentlink2description=Datasheet, componentlink2url=http://www.ti.com/lit/ds/symlink/tlv2372.pdf, ComponentLink3Description="Package Specification", ComponentLink3URL=http://www.ti.com/litv/pdf/msoi002j, DatasheetVersion=SLOS270D, Eco-Plan="Green (RoHS & no Sb/Br)", GBW(Typ)(MHz)=3, IIB(Max)(pA)=60, Iq per channel(Max)(mA)=0.9, Mounting Technology="Surface Mount", Number of Channels=2, Offset Drift(Typ)(uV/C)=2, PackageDescription="8-Pin Plastic Small Outline, Body 4.9 x 3.9 mm, Pitch 1.27 mm", PackageReference=D0008A, PackageVersion="4040047-3/M, 06/2011", Packing="LARGE T&R", PartNumber=TLV2372IDR, Slew Rate(Typ)(V/us)=2.4, Sub Family="Low Supply Voltage Amplifier (<=2.7V), Precision Amplifier", Vio (25C)(Max)(mV)=4.5
U5: "General ISM < 1GHz LoRaâ„¢ Transceiver Module 868MHz Antenna Not Included Surface Mount", Package="Non Standard RF Solutions", Availability="In Stock", Check_prices=https://www.snapeda.com/parts/RFM95W-868S2/RF+Solutions/view-part/?ref=eda, MF=RF, MP=RFM95W-868S2, price=None, Purchase-URL=https://pricing.snapeda.com/search?q=RFM95W-868S2&ref=eda, SnapEDA_Link=https://www.snapeda.com/parts/RFM95W-868S2/RF+Solutions/view-part/?ref=snap
U6: "0.96â€ 128 X 64 MONOCHROME GRAPHIC OLED DISPLAY MODULE - I2C", Package=Package, Check_prices=https://www.snapeda.com/parts/DM-OLED096-636/Display+Module/view-part/?ref=eda, MF="Display Module", MP=DM-OLED096-636, SnapEDA_Link=https://www.snapeda.com/parts/DM-OLED096-636/Display+Module/view-part/?ref=snap

## Via types
v1: diameter 1.27, hole 0.711, Top Layer to Bottom Layer, 76 vias

## Nets (pads, with @x,y where several pads share a name; then routed paths per layer and width w, separated by ;. In a path a pad name is that pad's centre, name@x,y a point inside that pad or via, vN(x,y) a via of type N, cw(c..) or ccw(c..) an arc to the next point about the centre after c; other vN are vias at no path point)
3V3: J1.04 R5.2 | length 42.3
  Top Layer w0.254: J1.04 38.31,38.927 ccw(c40.85,38.927) 39.054,37.131 39.543,37.131 v1(42.713,33.961) ; R5.2 ccw(c63.742,19.091) 63.742,17.121 65.198,17.121 65.958,17.881 ccw(c65.57,18.269) 66.118,18.269 ccw(c64.073,18.269) 65.519,19.715 v1@65.069,20.165
  Bottom Layer w0.254: v1(42.713,33.961) 42.907,33.767 42.907,33.231 55.964,20.174 65.017,20.174 v1(65.028,20.164)
+5: D2.1 D3.1 R3.2 U3.8 | length 40.6
  Top Layer w0.254: D2.1@2.76,12.734 ccw(c2.76,12.875) 2.901,12.875 D3.1 ; D3.1@2.895,18.097 2.895,21.733 ccw(c2.895,24.232) 5.394,24.232 5.394,33.708 9.317,33.708 10.485,34.876 R3.2@12.327,34.876 ; R3.2 14.617,34.89 14.617,26.581 U3.8@14.668,26.581
"ADC In": C6.2 MD1.8 U4.1 | length 72.5
  Top Layer w0.254: v1(12.733,11.811) 12.834,11.811 cw(c12.834,11.777) 12.868,11.777 ccw(c13.418,11.777) 13.418,11.227 C6.2 cw(c16.375,11.227) 16.375,12.604 U4.1@17.49,12.604 ; MD1.8 53.715,16.726 54.941,16.726 55.839,15.828 55.839,13.893 55.599,13.653 v1(55.599,11.966)
  Bottom Layer w0.254: v1(12.733,11.811) 12.733,7.937 ccw(c15.273,7.937) 15.273,5.397 22.645,5.397 cw(c22.645,2.941) 25.101,2.941 ccw(c26.776,2.941) 26.776,1.267 30.752,1.267 ccw(c30.752,3.807) 33.292,3.807 33.292,5.606 cw(c35.832,5.606) 35.832,8.146 51.304,8.146 cw(c51.304,8.1) 51.349,8.1 54.895,8.1 55.839,9.045 55.839,10.248 55.599,10.488 v1(55.599,11.966) ; 53.431,17.151 54.194,17.151
ANT: J2.1 U5.9 | length 39.6
  Top Layer w0.254: v1(46.287,35.773) 46.287,36.939 46.823,37.475 49.453,37.475 ccw(c49.453,37.662) J2.1 ; v1(69.299,21.992) 70.245,22.938 ccw(c68.449,24.734) 70.989,24.734 U5.9@70.989,25.208
  Bottom Layer w0.254: v1(46.287,35.773) 48.672,33.389 48.811,32.195 ccw(c58.445,33.315) 51.587,26.456 51.588,26.455 56.705,21.338 67.719,21.338 ccw(c67.719,23.571) v1(69.299,21.992)
bat+: Battery.1 C9.1 C10.1 C11.1 R2.2 U1.12-13 U3.5 | length 36.5
  Top Layer w0.254: U3.5 16.666,22.82 ccw(c16.666,24.671) 18.517,24.671 cw(c19.848,24.671) 19.848,26.002 C9.1@20.534,26.002 ; Battery.1 cw(c20.286,35.255) 20.534,35.255 20.534,30.687 cw(c20.28,30.687) 20.507,30.573 ccw(c21.412,30.113) 20.506,29.653 cw(c20.28,29.538) 20.534,29.538 C9.1@20.534,26.03 ; C9.1 C10.1@24.068,26.048 ; C10.1 26.836,26.102 ccw(c26.836,26.177) R2.2@26.911,26.177 ; R2.2 cw(c26.882,24.651) 28.402,24.651 v1(28.402,23.533) ; R2.2@26.911,26.171 29.796,26.171 cw(c29.796,26.025) C11.1@29.941,26.025 ; U1.12-13 27.623,19.495 27.979,19.851 28.039,19.851 28.593,20.405 v1(28.868,20.405)
  Bottom Layer w0.254: v1(28.402,23.533) 28.402,21.548 28.673,21.276 28.673,20.599 v1(28.868,20.405)
Chrg: R9.1 U3.7 | length 18.2
  Top Layer w0.254: R9.1 10.424,16.349 ccw(c10.8,16.349) 10.8,15.972 cw(c10.8,15.562) 11.21,15.562 v1(11.21,15.547) ; U3.7@14.822,25.383 cw(c14.959,25.383) 14.959,25.519 v1(16.871,25.519)
  Bottom Layer w0.254: v1(11.21,15.547) 12.561,15.547 ccw(c12.561,16.61) 13.623,16.61 13.623,19.342 ; 13.623,19.344 cw(c15.97,19.344) 14.31,21.003 cw(c15.558,19.755) 15.558,21.52 ccw(c15.558,22.787) 16.826,22.787 16.826,25.474 cw(c16.871,25.474) v1(16.871,25.519)
CST: C1.1 J1.05 MD1.29 U5.5 | length 52
  Top Layer w0.254: C1.1@32.824,27.672 32.824,29.016 cw(c35.364,29.016) 33.568,30.812 v1(34.148,31.392) ; C1.1 32.846,24.646 32.677,24.477 32.677,21.824 33.633,20.868 33.971,20.868 34.927,19.912 35.899,19.912 MD1.29@36.28,19.53 ; v1(41.737,30.944) 44.941,34.149 ccw(c44.863,34.227) v1(44.974,34.227) ; v1(47.844,29.957) 48.271,30.384 cw(c50.067,28.588) 50.067,31.128 U5.5@56.682,31.128
  Bottom Layer w0.254: v1@34.182,31.684 cw(c36.087,31.684) 34.74,33.03 J1.05 ; v1@34.187,31.688 34.187,31.684 34.187,31.486 cw(c34.054,31.486) v1(34.148,31.392) 34.423,31.392 34.753,31.062 41.619,31.062 v1(41.737,30.944) ; v1(44.974,34.227) 47.1,32.102 cw(c45.304,30.306) 47.844,30.306 v1(47.844,29.957)
DTR: C5.1 J1.01 | length 48.5
  Top Layer w0.254: J1.01 36.123,33.707 ccw(c37.919,35.503) 37.919,32.963 v1(38.163,32.963) ; C5.1 59.157,18.096 cw(c60.953,16.3) 60.953,18.84 63.276,18.84 cw(c63.276,17.165) 64.46,18.349 v1@64.584,18.226
  Bottom Layer w0.254: v1(38.163,32.963) 41.428,32.963 54.989,19.402 63.502,19.402 v1(64.692,18.212)
GND: "Rogowski Coil Connector.2" "Solar Connector.2" Battery.2 C2.2 C3.1 C4.1 C7.1 C8.1 C9.2 C10.2 C11.2 C12.2 GPS.10 GPS.12 GPS.13 GPS.24 J1.06 J2.2 J2.3 J3.2 J3.3 MD1.1 MD1.15 MD1.38 MD1.39 R6.1 R11.1 R14.1 U1.4 U1.10 U1.15 U3.1 U3.3 U4.4 U5.1 U5.8 U5.10 U6.1 | length 399
  Top Layer w0.254: C4.1 ccw(c2.154,27.835) 4.007,27.835 4.007,28.543 cw(c4.007,28.514) v1(4.036,28.514) ; 5.394,35.708 9.3,35.708 ccw(c9.3,36.733) 10.325,36.733 cw(c10.352,36.733) 10.352,36.76 v1(10.366,36.76) ; 5.492,5.553 5.996,5.553 cw(c5.996,3.261) 8.288,3.261 ccw(c10.668,3.261) 10.668,0.881 14.777,0.881 ccw(c14.777,2.588) R11.1@16.485,2.588 ; R6.1@6.446,27.172 ccw(c6.479,27.172) 6.479,27.139 8.06,27.139 8.06,28.255 cw(c8.366,28.255) v1(8.366,28.56) cw(c8.366,27.159) 9.767,27.159 U3.1@9.767,26.534 ; v1(7.576,24.195) 9.8,24.195 cw(c9.8,24.119) U3.3@9.877,24.119 ; R14.1 cw(c14.929,14.406) 15.872,14.406 15.872,14.164 ccw(c15.937,14.164) 15.937,14.099 v1(16.04,14.099) ; R11.1@16.45,2.564 16.926,2.564 ccw(c16.926,4.569) 18.931,4.569 18.931,6.098 ccw(c17.84,6.098) v1(17.84,7.189) 17.84,8.588 ccw(c17.523,8.588) U4.4@17.523,8.905 ; C9.2@20.691,24.159 20.829,24.021 v1(20.829,21.628) 20.829,21.113 ccw(c23.369,21.113) 21.573,19.317 23.012,17.877 ccw(c23.26,17.877) 23.084,17.702 v1@23.466,17.321 ; C9.2 24.004,24.196 ccw(c24.004,24.223) C10.2@24.031,24.223 ; v1@21.375,30.053 25.569,30.053 ccw(c25.569,32.593) 27.365,30.797 27.677,31.108 27.677,32.016 cw(c29.424,32.016) 28.189,33.252 33.918,33.252 cw(c33.918,30.712) 35.714,32.508 v1(35.898,32.324) ; v1(21.412,30.113) 22.262,30.962 Battery.2@22.262,35.33 ; C12.2 24.112,14.09 ccw(c25.908,15.886) 25.908,13.346 v1@26.409,13.346 ; v1(23.487,17.264) ccw(c23.785,17.264) 23.574,17.053 23.795,16.832 ccw(c23.851,16.832) 23.812,16.792 25.014,15.59 cw(c25.731,14.873) 25.731,15.887 U1.4 ccw(c25.948,16.799) 26.593,16.154 U1.10@27.053,16.615 ; C10.2 ccw(c26.233,24.25) 26.233,22.085 28.325,22.085 ccw(c28.325,23.651) 29.891,23.651 C11.2@29.891,24.796 ; 25.034,22.463 ccw(c25.175,22.322) 24.975,22.322 24.975,19.435 U1.15 ; v1(26.704,13.33) 27.594,12.44 cw(c26.658,11.503) C2.2@27.982,11.503 ; C2.2 cw(c27.06,10.64) 28.313,10.64 C3.1@28.313,8.941 ; C3.1 cw(c28.217,8.796) 28.313,8.796 C7.1@28.313,6.218 ; C7.1 cw(c28.066,5.917) 28.443,5.917 C8.1@28.443,3.42 ; J1.06 50.641,39.14 cw(c50.641,38.777) 50.898,39.033 50.898,36.294 ccw(c51.275,36.294) J2.2@51.008,36.027 ; MD1.39@44.036,15.676 45.875,15.676 45.892,15.659 45.896,15.654 MD1.39@47.57,15.654 ; MD1.39@44.047,15.676 44.047,17.484 MD1.39@44.057,17.494 ; MD1.39@44.057,13.824 44.08,13.801 MD1.39@46.02,13.801 ; MD1.39@45.879,15.698 45.892,15.711 MD1.39@45.892,17.494 ; MD1.39@45.892,13.824 MD1.39@47.699,13.824 ; MD1.39@47.722,17.605 47.727,17.6 47.727,15.659 47.727,13.824 47.82,13.731 v1(50.369,13.731) ; MD1.15@50.583,25.924 50.583,26.195 50.93,26.542 52.342,26.542 v1(53.623,27.823) 56.364,25.082 ccw(c56.509,25.227) U5.8@56.509,25.022 ; J2.3 54.302,39.004 ; MD1.1 53.942,8.159 54.265,7.836 54.265,7.135 55.85,5.55 55.85,3.193 56.095,2.948 57.03,2.948 ; v1(54.189,37.866) cw(c54.462,37.866) 54.269,38.059 54.359,38.149 cw(c54.495,38.285) 54.302,38.285 54.302,39.004 ; U5.8 57.884,23.878 ccw(c59.079,25.073) v1(59.079,23.383) ; U5.1@56.692,39.071 cw(c56.531,39.232) 56.531,39.004 54.302,39.004 ; GPS.10@58.902,3.282 59.147,3.527 v1(62.4,3.527) ; GPS.10@58.917,3.267 58.787,3.137 57.196,3.137 57.047,2.988 57.047,1.247 57.196,1.098 GPS.12@58.98,1.098 ; GPS.12 GPS.13@70.93,1.13 ; v1(68.496,15.071) GPS.24@71.205,15.071 ; GPS.13@70.9,1.164 91.092,1.164 J3.2 ; U5.10@71.426,27.123 71.937,27.123 cw(c71.937,25.185) 73.308,26.556 cw(c73.151,26.399) 73.373,26.399 73.373,24.972 cw(c70.833,24.972) 72.629,23.176 v1(71.975,22.522) ; J3.2@91.236,1.266 J3.3
  Bottom Layer w0.254: v1@4.031,28.542 cw(c4.031,28.583) 3.99,28.583 3.99,30.016 7.826,30.016 ccw(c7.826,32.556) 10.366,32.556 v1(10.366,36.76) 12.796,36.76 cw(c12.796,34.22) 15.336,34.22 15.336,30.147 15.485,29.999 20.437,29.999 ; v1(4.036,28.514) 4.978,28.514 ; v1(7.576,24.195) cw(c7.452,24.195) 7.452,24.071 7.308,24.071 cw(c7.308,26.4) 4.978,26.4 4.978,28.514 ; v1@8.1,28.514 8.319,28.514 ccw(c8.319,28.56) v1(8.366,28.56) ; v1@8.1,28.514 4.978,28.514 ; v1(17.84,7.189) 17.84,7.676 17.765,7.75 17.709,7.807 cw(c17.84,8.756) 16.881,8.756 16.881,13.258 16.807,13.332 v1(16.04,14.099) 17.127,14.099 17.896,13.33 v1(26.704,13.33) ; v1(20.829,21.628) 20.716,21.515 19.375,21.515 18.649,22.242 18.649,27.573 cw(c21.189,27.573) 21.189,30.113 v1(21.412,30.113) ; v1(23.487,17.264) 23.487,16.889 ccw(c26.027,16.889) 24.231,15.093 25.547,13.777 ccw(c26.679,14.909) v1@26.679,13.308 ; v1@35.866,32.58 35.866,32.401 ccw(c35.975,32.401) v1(35.898,32.324) ; v1@35.93,32.644 cw(c37.938,32.644) 36.518,34.064 37.082,34.627 38.38,34.627 ccw(c38.38,34.736) 38.457,34.659 42.618,38.82 cw(c43.39,38.049) J1.06 ; v1(50.369,13.731) 61.219,13.731 62.288,12.662 62.288,9.213 ; v1(53.623,27.823) 53.676,27.876 ccw(c53.531,28.021) 53.736,28.021 ccw(c52.644,29.114) 54.189,29.114 v1(54.189,37.866) ; v1(59.079,23.383) 70.036,23.383 cw(c70.036,20.843) 71.832,22.639 v1@71.962,22.509 ; v1(62.4,3.527) 62.288,3.639 62.288,9.213 ; v1@68.473,15.155 68.496,15.132 68.496,9.531 68.178,9.213 62.288,9.213 ; v1@68.496,15.155 68.496,19.044 v1(71.975,22.522) 75.469,22.522 ccw(c75.469,25.062) 77.265,23.266 82.504,28.505 ccw(c81.978,29.031) 82.722,29.031 ; 82.747,29.05 84.534,30.837 U6.1@98.03,30.837
GPS_RX: GPS.20 MD1.28 | length 45
  Top Layer w0.254: MD1.28 36.715,21.182 37.62,21.182 38.384,21.946 49.272,21.946 49.899,21.319 49.899,18.844 49.281,18.227 v1(49.281,15.477) ; v1(63.966,10.911) 70.698,10.911 GPS.20@70.903,10.706
  Bottom Layer w0.254: v1(49.281,15.477) 50.011,14.747 61.798,14.747 64.054,12.491 64.054,10.999 v1(63.966,10.911)
GPS_TX: GPS.21 MD1.27 | length 42.4
  Top Layer w0.254: MD1.27 36.942,22.129 37.381,22.568 37.55,22.568 37.571,22.59 49.506,22.59 50.736,21.36 50.736,16.618 v1(50.677,16.56) ; v1(66.132,12.872) 67.185,11.818 GPS.21@71.078,11.818
  Bottom Layer w0.254: v1(50.677,16.56) 51.76,15.477 63.79,15.477 66.132,13.135 v1(66.132,12.872)
IO0: MD1.12 U5.14 | length 29.1
  Top Layer w0.254: MD1.12@53.787,22.209 62.125,22.209 ccw(c62.125,24.749) 63.921,22.953 64.095,23.128 64.095,33.781 cw(c64.618,33.781) 64.249,34.151 64.462,34.364 cw(c66.258,32.568) 66.258,35.108 U5.14
MISO: MD1.31 U5.2 | length 35.6
  Top Layer w0.254: MD1.31@36.566,17.191 38.012,17.191 38.784,16.419 v1(38.784,16.347) ; v1(41.175,28.227) ccw(c40.862,28.227) 41.083,28.449 40.98,28.552 46.663,34.234 cw(c48.459,32.438) 48.459,34.978 53.055,34.978 53.055,35.624 cw(c54.743,35.625) 53.549,36.819 56.365,36.819 U5.2
  Bottom Layer w0.254: v1(38.784,16.347) 40.431,17.994 40.431,18.72 ccw(c38.635,20.516) 41.175,20.516 v1(41.175,28.227)
MOSI: MD1.37 U5.3 | length 39.2
  Top Layer w0.254: MD1.37@36.436,9.307 cw(c37.118,8.625) 37.118,9.59 38.724,9.59 ccw(c37.565,10.749) 39.205,10.749 v1(39.205,11.963) ; v1(43.329,28.801) ccw(c43.125,29.006) 43.414,29.006 43.414,29.056 48.057,33.698 cw(c49.262,32.492) 49.262,34.198 54.691,34.198 ccw(c54.691,36.738) 56.488,34.941 U5.3
  Bottom Layer w0.254: v1(39.205,11.963) ccw(c39.273,11.963) 39.225,11.915 39.261,11.878 39.261,14.414 cw(c41.801,14.414) 40.005,16.21 42.058,18.263 42.058,26.478 cw(c44.598,26.478) 42.802,28.274 v1(43.329,28.801)
NetC1_2: C1.2 MD1.25 R1.1 | length 13.7
  Top Layer w0.254: R1.1 ccw(c31.801,22.156) 31.801,21.413 32.283,21.413 33.404,20.292 cw(c33.155,20.043) 33.507,20.043 33.788,19.762 cw(c33.34,19.315) v1(33.973,19.315) ; v1(33.965,22.191) 34.077,22.303 34.077,23.207 35.067,24.197 35.424,24.554 MD1.25@35.46,24.59 ; C1.2 cw(c34.154,27.63) 34.213,27.63 34.213,25.067 ccw(c35.403,26.257) MD1.25@35.403,24.574
  Bottom Layer w0.254: v1(33.965,22.191) 33.969,22.187 33.969,19.319 v1(33.973,19.315)
NetC4_2: C4.2 R3.1 U3.4 | length 24.7
  Top Layer w0.254: C4.2 3.601,23.982 cw(c3.601,23.843) 3.739,23.843 3.995,23.843 ccw(c3.995,23.964) v1(4.116,23.964) ; v1(6.929,22.471) 9.27,22.471 ccw(c9.27,22.874) U3.4@9.674,22.874 ; U3.4 ccw(c11.532,22.82) 11.532,21.031 12.056,21.031 ccw(c12.056,21.084) v1(12.11,21.084) ; v1(12.188,30.557) 12.188,33.236 cw(c12.283,33.236) R3.1@12.283,33.33
  Bottom Layer w0.254: v1(4.116,23.964) 5.529,23.964 cw(c5.529,22.807) 6.686,22.807 6.686,22.713 ccw(c6.929,22.713) v1(6.929,22.471) ; v1(12.11,21.084) 12.11,30.591 cw(c12.151,30.591) 12.151,30.632 12.151,30.594 ccw(c12.188,30.594) v1(12.188,30.557)
NetC5_2: C5.2 MD1.3 R5.1 | length 26.6
  Top Layer w0.254: v1(50.164,10.672) MD1.3@53.564,10.672 ; MD1.3 ccw(c54.299,11.606) MD1.3@54.299,10.323 ; v1@55.712,17.946 56.458,17.946 57.405,18.128 C5.2 57.491,17.644 57.252,17.268 57.252,17.089 57.401,16.94 58.294,16.94 ccw(c58.294,19.496) 58.713,16.974 59.686,17.136 59.909,17.359 59.909,17.512 59.99,17.593 60.181,17.757 60.285,17.757 60.751,17.721 R5.1
  Bottom Layer w0.254: v1(50.164,10.672) 48.265,12.571 48.265,16.865 49.241,17.841 54.379,17.841 ccw(c54.378,18.286) 54.525,17.866 55.261,18.12 55.362,18.12 v1(55.702,17.955)
NetC6_1: C6.1 R8.2 U4.2 | length 7.7
  Top Layer w0.254: R8.2 12.347,7.334 ccw(c12.347,9.874) 14.887,9.874 C6.1@14.887,9.892 ; C6.1 15.438,9.877 ccw(c15.438,10.6) 16.161,10.6 cw(c16.967,10.6) 16.967,11.406 U4.2@17.512,11.406
NetC12_1: C12.1 U1.3 | length 13
  Top Layer w0.254: v1(20.787,15.238) 21.743,15.238 cw(c21.743,14.571) C12.1@22.214,15.043 ; v1(22.851,20.061) 22.851,18.815 23.122,18.544 23.835,18.544 24.542,17.838 24.542,17.022 25.177,16.387 25.198,16.387 U1.3
  Bottom Layer w0.254: v1(20.787,15.238) 20.787,15.289 22.367,16.87 22.367,19.404 22.851,19.887 v1(22.851,20.061)
NetD2_2: D2.2 R7.2 | length 3.5
  Top Layer w0.254: D2.2 9.565,12.91 ccw(c9.565,13.109) R7.2@9.764,13.109
NetD3_2: D3.2 R9.2 | length 4.4
  Top Layer w0.254: D3.2 8.116,18.112 ccw(c8.116,18.645) 8.65,18.645 cw(c8.822,18.645) 8.822,18.817 R9.2@10.455,18.817
NetGPS_9: GPS.9 L2.2 | length 17.7
  Top Layer w0.254: GPS.9 59.253,4.703 62.355,4.703 64.807,7.154 L2.2@75.535,7.154
NetGPS_11: GPS.11 J3.1 L2.1 | length 35.4
  Top Layer w0.254: GPS.11 64.017,2.23 v1(64.024,2.237) ; L2.1@85.285,6.987 85.509,6.763 v1(85.509,2.545) 89.507,2.545 J3.1@89.684,2.722
  Bottom Layer w0.254: v1(64.024,2.237) 64.178,2.391 85.355,2.391 v1(85.509,2.545)
NetL1_1: L1.1 U1.11 | length 4.7
  Top Layer w0.254: U1.11 cw(c29.639,15.372) 29.639,17.869 L1.1@32.403,17.869
NetL1_2: L1.2 U1.9 | length 4.9
  Top Layer w0.254: U1.9 ccw(c29.288,17.553) 29.288,15.551 L1.2@32.622,15.551
NetR2_1: R2.1 U1.1 U1.14 | length 8.4
  Top Layer w0.254: U1.1 26.726,17.387 26.875,17.536 U1.14@26.875,17.846 ; v1(26.685,23.155) ccw(c26.685,23.352) 26.882,23.352 R2.1 ; U1.14 26.875,18.039 26.875,20.468 v1(26.944,20.536)
  Bottom Layer w0.254: v1(26.685,23.155) 26.814,23.025 26.814,20.665 v1(26.944,20.536)
NetR4_1: R4.1 R14.2 U1.5 | length 15.2
  Top Layer w0.254: R14.2 14.727,16.947 14.727,17.015 14.727,17.041 cw(c15.636,16.868) 15.636,17.793 17.169,17.793 17.185,17.802 R4.1 17.458,17.963 17.731,18.236 21.925,18.236 22.074,18.087 22.074,16.356 22.223,16.207 23.626,16.207 23.859,15.974 cw(c23.082,15.197) 24.181,15.197 ; 24.199,15.176 ccw(c25.795,20.065) 25.625,14.924 25.672,14.944 U1.5
NetR6_2: R6.2 U3.2 | length 3.6
  Top Layer w0.254: R6.2 7.647,25.941 cw(c7.647,25.573) 8.015,25.573 ccw(c8.272,25.573) 8.272,25.316 U3.2@9.728,25.316
NetR8_1: "Rogowski Coil Connector.1" R8.1 | length 7.2
  Top Layer w0.254: 5.492,7.553 cw(c6.546,7.553) 6.546,8.606 R8.1@12.044,8.606
NetR10_2: R10.2 R11.2 U4.3 | length 12